# Altium PCB PCB3.PcbDoc
Units mm, origin at the board's own origin, x right, y up, seen from the top; angles counter-clockwise.
Board outline 119.2 x 62.5 mm, 4 copper layers (Top Layer, PWR, GND, Bottom Layer), stack 2.287 mm thick; 32 components, 37 nets, 142 pads, 47 vias.
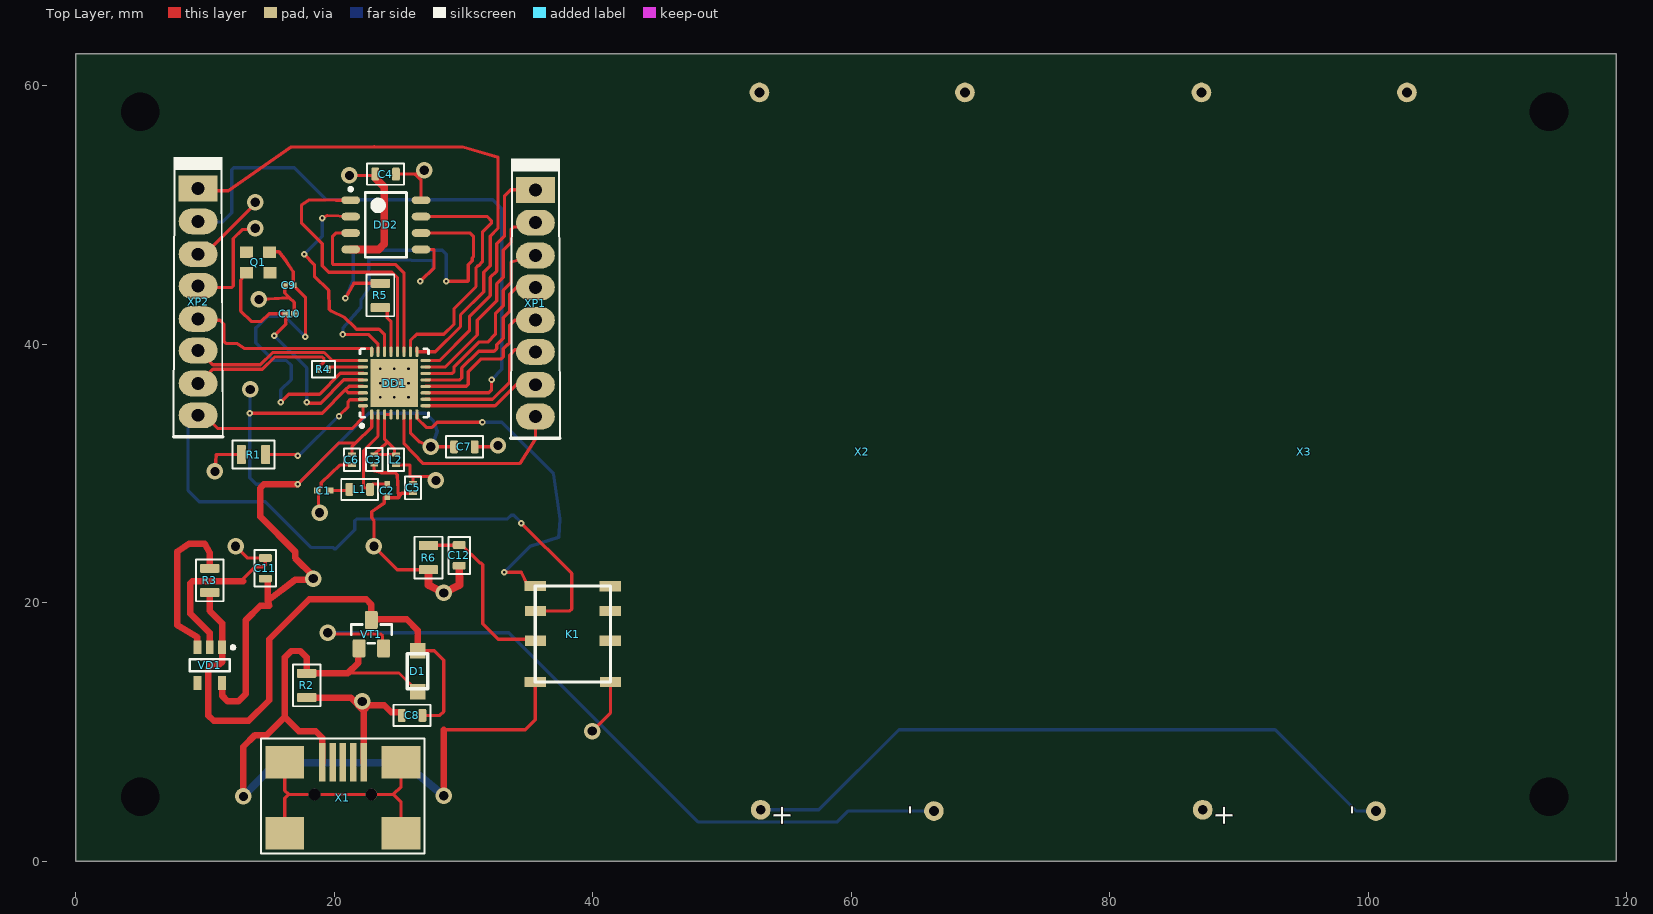
[diagram p0: Top Layer view]
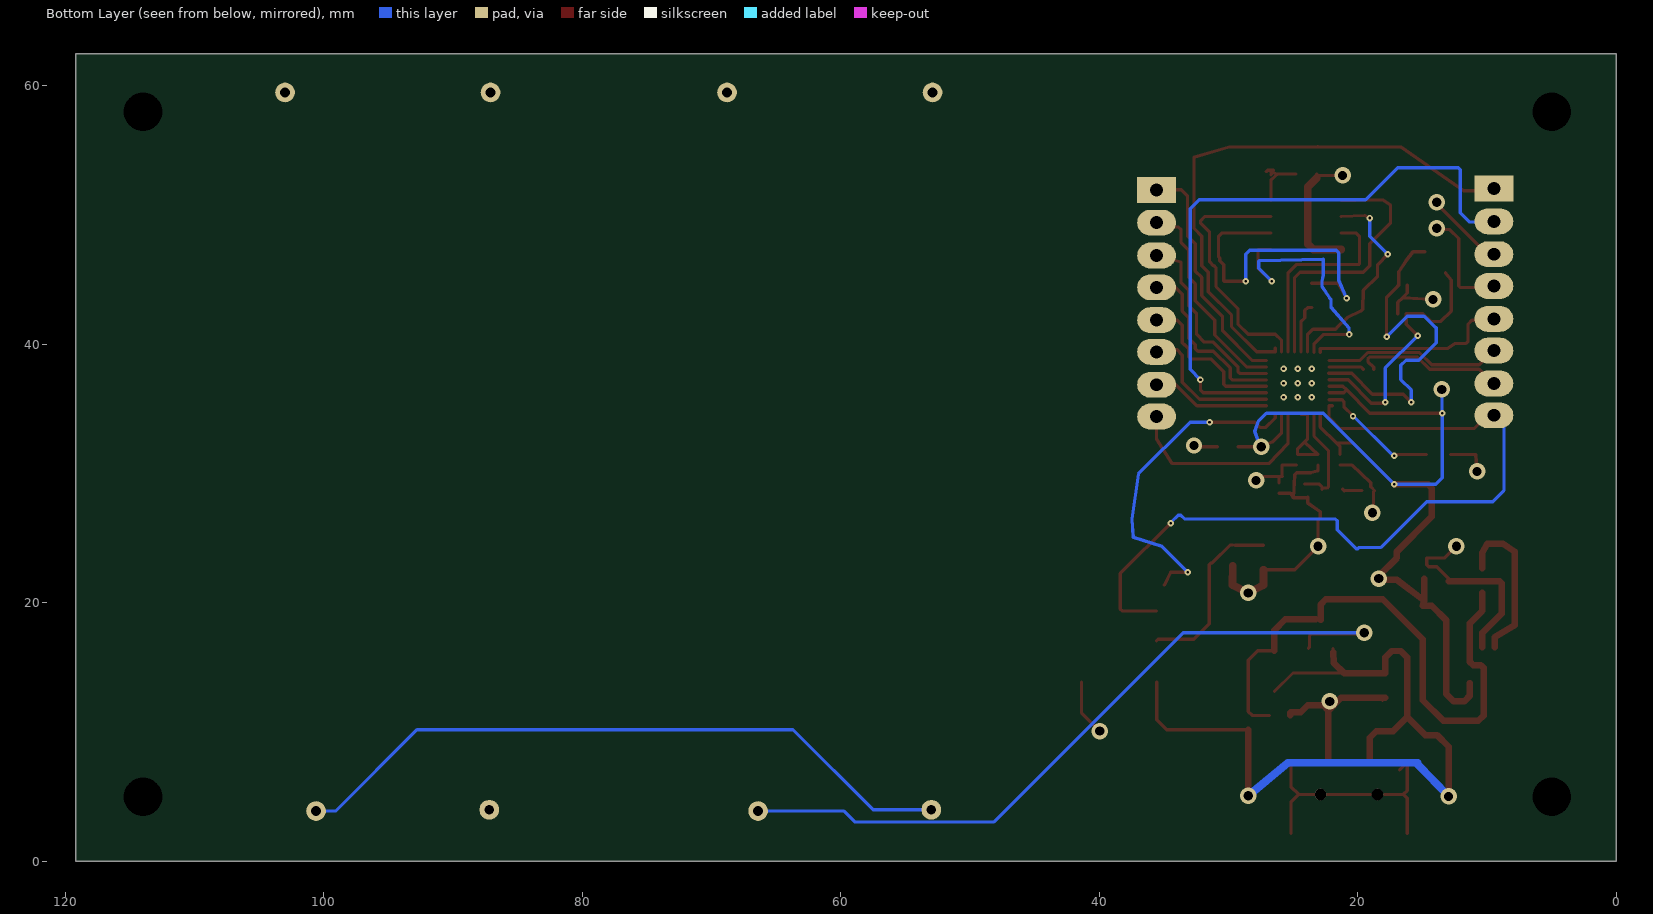
[diagram p1: Bottom Layer view, seen from below]
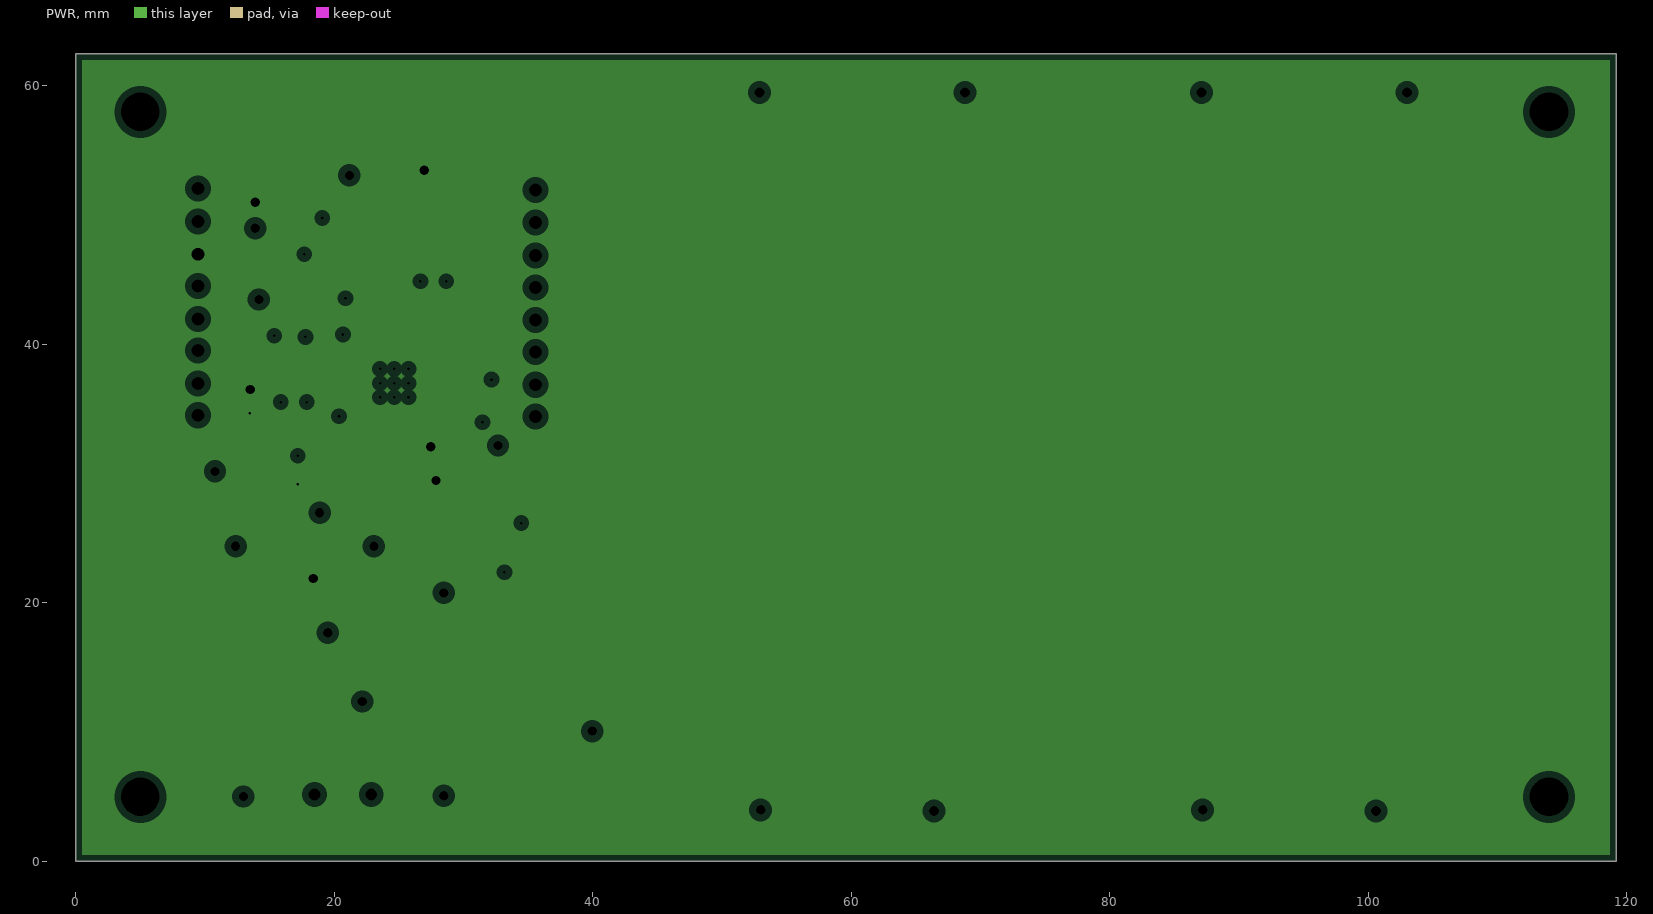
[diagram p2: PWR, clearances drawn from the general rule]
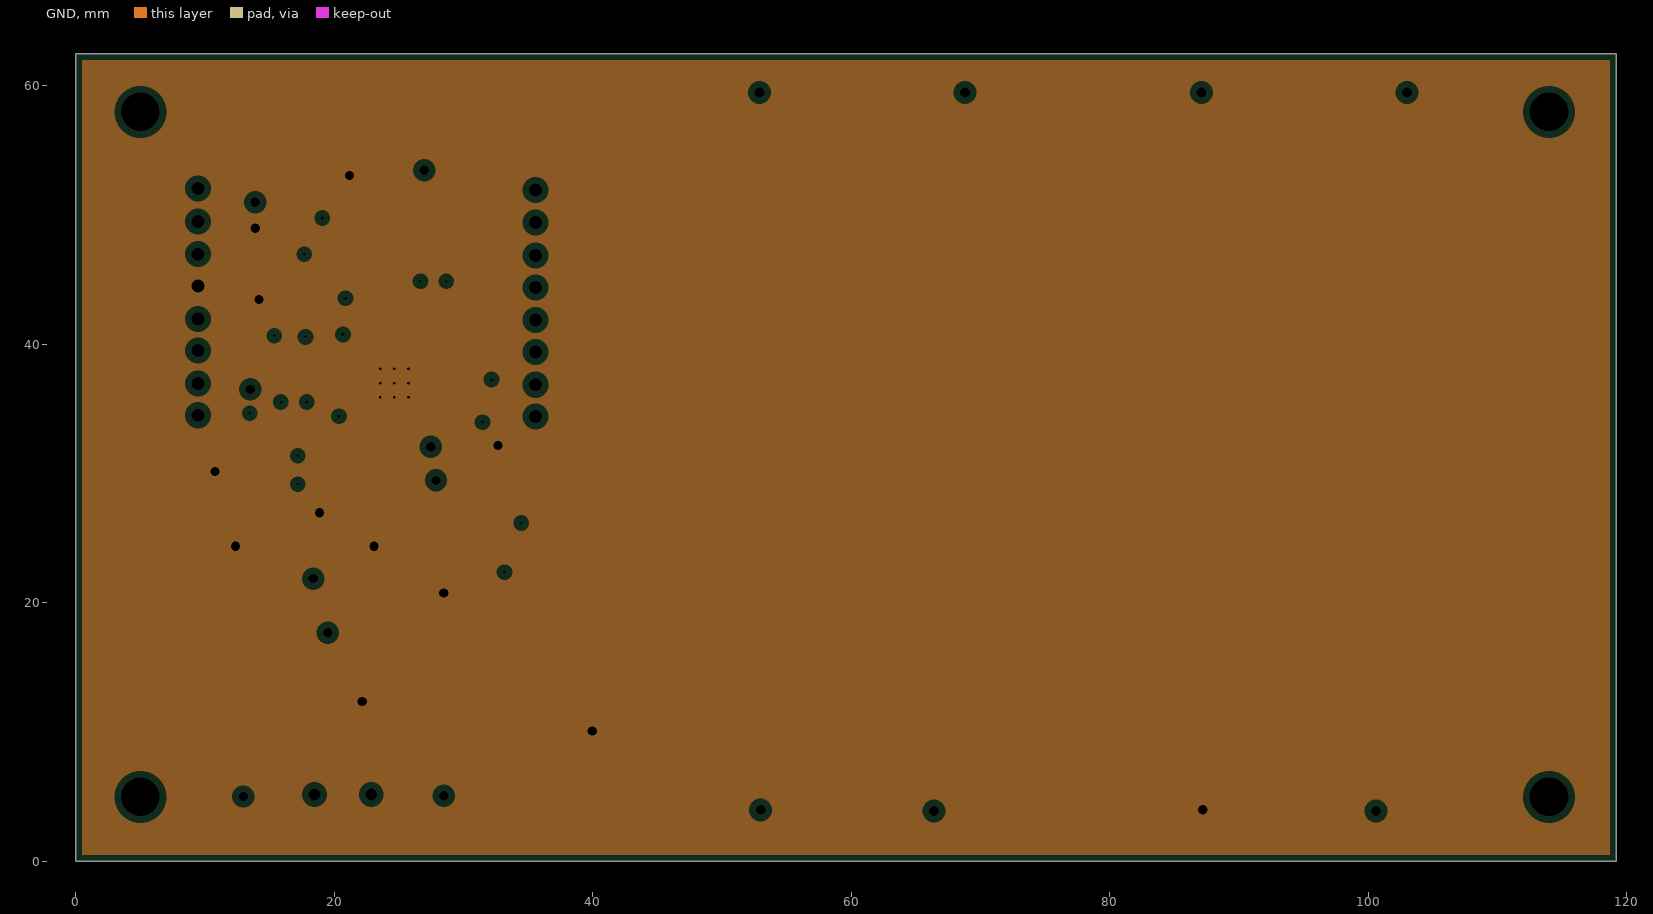
[diagram p3: GND, clearances drawn from the general rule]

## Layer stack, top to bottom
Top Solder: solder mask 0.2, SM-001, Dk 4
Top Layer: signal copper 0.14
Dielectric 2: prepreg 0.2184, PP-023, Dk 4.5
PWR: plane copper 0.035, net 3,3B
Dielectric 1: dielectric 1.5, FR-4, Dk 4.8
GND: plane copper 0.035, net GND
Dielectric 3: prepreg 0.2184, PP-023, Dk 4.5
Bottom Layer: signal copper 0.14
Bottom Solder: solder mask 0.2, SM-001, Dk 4

## Board outline
0,62.5 0,0 119.2,0 119.2,62.5

## Design rules (kind name [scope] priority, off if disabled: settings)
Clearance [All] p1: gap=0.05 ignorepadtopadclearanceinfootprint=TRUE
DiffPairsRouting [All] p1: maxlimit=0.105 minlimit=0.105 mostfreqgap=0.105 toplayer_minwidth=0.248 toplayer_maxwidth=0.248 toplayer_prefwidth=0.248 bottomlayer_minwidth=0.248 bottomlayer_maxwidth=0.248 bottomlayer_prefwidth=0.248 impedanceprofiledriven=TRUE impedanceprofileid={7DA2E2B2-6656-4094-B7E5-A7630A5B4F27} impedanceprofilevalue=50.000000 maxuncoupledlength=12.7
HoleToHoleClearance [All] p1: gap=0.127 allowstackedmicrovias=TRUE
MinimumSolderMaskSliver [All] p1: minsoldermaskwidth=0.05
PlaneClearance [All] p1: clearance=0.508
PlaneConnect [All] p1: planeconnectstyle=Relief reliefexpansion=0.508 reliefentries=4 reliefconductorwidth=0.1 reliefairgap=0.1
PolygonConnect [All] p1: connectstyle=Relief reliefconductorwidth=0.254 reliefentries=4 polygonreliefangle="90 Angle" airgapwidth=0.254
RoutingVias [All] p1 off: holewidth=0.711 width=1.27 viastyle="Through Hole" minholewidth=0.711 minwidth=1.27 maxholewidth=0.711 maxwidth=1.27
ShortCircuit [All] p1: allowed=TRUE
SilkToSilkClearance [All] p1: silktosilkclearance=0.1
SilkToSolderMaskClearance [IsText] p1: minsilkscreentomaskgap=0.1 clearancetoexposedcopper=TRUE
SolderMaskExpansion [All] p1: expansion=0.05 istentingtop=FALSE soldermaskfromhole=TRUE
UnRoutedNet [All] p1: checkbadconnections=TRUE
Width [All] p1: maxlimit=0.6 minlimit=0.1 preferedwidth=0.25 minimp=50.000000 maximp=50.000000 favimp=50.000000
21 further rules are at their usual default settings.

## Classes and differential pairs
differential pair UART: +UART_P -UART_N

## Components (designator, comment, footprint, x,y, rotation, side; value= is the part's Value field where it differs from the comment)
C1 "3пФ" "0201 C0G 7пФ 25В"#1 19.2,28.7 r180 top
C4 "10мкФ" "FB 0603" 23.974,53.184 r0 top
C5 "0,1мкФ" "RES 0402"#1 26.1,28.9 r270 top
C6 "100нФ" "RES 0402"#2 21.374,31.084 r270 top
C8 "10мкФ" "FB 0603" 26.025,11.3 r0 top
C9 "7пкФ" "0201 C0G 7пФ 25В"#2 16.504,44.584 r0 top
C10 "7пкФ" "0201 C0G 7пФ 25В"#2 16.574,42.384 r180 top
D1 "" MBR120 25.85,16.825 r270 top
DD1 "esp8266ex" ESP8266 24.649,37.009 r90 top
DD2 "M25P16-VMN6TP" SOIC-8(3.90мм) 23.999,49.259 r0 top
K1 "gost relay" RELE 41.374,13.884 r90 top
L1 "2,2нГ" "FB 0603" 21.974,28.784 r0 top
L2 "4,3нГ" "RES 0402"#1 24.774,31.084 r270 top
Q1 "26МГц" SMD02520C4 14.125,46.3 r0 top
R1 "12k" "RES 0805" 13.774,31.484 r180 top
R2 "10k" "RES 0805" 17.874,13.634 r270 top
R3 "2K" "RES 0805" 10.374,21.759 r270 top
R4 "499К" "RES 0402"#1 19.174,38.084 r180 top
R5 "200Ом" "RES 0805" 23.574,43.784 r90 top
R6 "2K" "RES 0805" 27.3,23.5 r90 top
VD1 "ap2112" 2112 10.374,15.184 r270 top
VT1 "" SOT23-3 22.874,17.684 r0 top
X1 "usb_micro" USB_mini_B 20.674,-0.716 r180 top
X2 "battery_x2" Battery_x2AA 52.9,59.5 r270 top
X3 "battery_x2" Battery_x2AA 87.1,59.5 r270 top
XP1 "PLD-8" PLD-8 35.574,39.424 r270 top
XP2 "PLD-8" PLD-8 9.474,39.524 r270 top
С2 "2,4пФ" "0201 C0G 7пФ 25В"#1 24.1,28.7 r270 top
С3 "0,1мкФ" "RES 0402"#3 23.1,31.1 r270 top
С7 "1мкФ" "FB 0603" 30.074,32.084 r0 top
С11 "10мкФ" "FB 0603" 14.674,22.684 r270 top
С12 "10мкФ" "FB 0603" 29.674,23.684 r90 top

## Footprints (in the part's own frame and the unit in brackets; to place one, negate y for a bottom-side part, rotate by r counter-clockwise, add the part's x,y. Pads: shape width x height; smd on the part's side, far side on the other; paste and mask are expansions set on the pad)
"0201 C0G 7пФ 25В"#1 [mm] "Chip Capacitor, 2-Leads, Body 0,60x0,30mm, IPC Medium Density"
  rect 0.5x0.44 smd: 1(-0.5,0) 2(0.5,0)
  body extent -0.3,-0.15 0.3,0.15, height 0.23
"0201 C0G 7пФ 25В"#2 [mm] "Chip Capacitor, 2-Leads, Body 0,60x0,30mm, IPC Medium Density"
  rect 0.5x0.44 smd: 1(-0.33,0) 2(0.33,0)
  body extent -0.3,-0.15 0.3,0.15, height 0.23
2112 [mm] "SOT23, 5-Leads, Body 3,00x2,85mm, Pitch 0,95mm, IPC Medium Density"
  rect 1.05x0.6 smd: 1(-1.375,0.95) 2(-1.375,0) 3(-1.375,-0.95) 4(1.375,-0.95) 5(1.375,0.95)
  silkscreen extent -1.5,-1.55 0.45,1.93, body extent -0.85,-1.55 0.85,1.55, height 1.1
Battery_x2AA [mil]
  round 60 hole 30: 1(2188.98,531.5) 2(2185.04,3.94) 99(0,625.98) 99(0,0)
  body extent -43,-358 2232,882, height 630
ESP8266 [mm] "QFN, 32-Leads, Body 5,00x5,00mm, Pitch 0,50mm, Thermal Pad 3,70x3,70mm, IPC Medium Density"
  oval 0.8x0.25 smd: 1(-2.425,1.75) 2(-2.425,1.25) 3(-2.425,0.75) 4(-2.425,0.25) 5(-2.425,-0.25) 6(-2.425,-0.75) 7(-2.425,-1.25) 8(-2.425,-1.75) 17(2.425,-1.75) 18(2.425,-1.25) 19(2.425,-0.75) 20(2.425,-0.25) 21(2.425,0.25) 22(2.425,0.75) 23(2.425,1.25) 24(2.425,1.75)
  oval 0.25x0.8 smd: 9(-1.75,-2.425) 10(-1.25,-2.425) 11(-0.75,-2.425) 12(-0.25,-2.425) 13(0.25,-2.425) 14(0.75,-2.425) 15(1.25,-2.425) 16(1.75,-2.425) 25(1.75,2.425) 26(1.25,2.425) 27(0.75,2.425) 28(0.25,2.425) 29(-0.25,2.425) 30(-0.75,2.425) 31(-1.25,2.425) 32(-1.75,2.425)
  rect 3.7x3.7 smd: 33(0,0)
  silkscreen extent -3.42,-2.65 2.65,2.65, body extent -2.5,-2.5 2.5,2.5, height 0.7
"FB 0603" [mm]
  rrect35% 0.6x1 smd: 1(-0.8,0) 2(0.8,0)
  silkscreen extent -1.43,-0.82 1.43,0.82, body extent -0.8,-0.43 0.8,0.43, height 0.9
MBR120 [mm]
  rect 1.2x1.2 smd: 1(0.525,0.6) 2(3.675,0.6)
  silkscreen extent 0.75,-0.2 3.45,1.4, body extent 0.4,-0.32 3.4,1.48, height 0.25
PLD-8 [mm]
  rect 2x3 hole 1: 1(-12.54,0)
  oval 2x3 hole 1: 2(-10,0) 3(-7.46,0) 4(-5,0) 5(-2.46,0) 6(0,0) 7(2.54,0) 8(5,0)
  silkscreen extent -14.97,-1.9 6.67,1.91, body extent -13.81,-1.28 6.36,1.25, height 8.5
RELE [mm]
  rect 0.8x1.65 smd: 1(0,5.825) 2(3.2,5.8) 3(5.5,5.8) 4(7.425,5.825) 5(7.399,0.026) 6(5.499,0.026) 7(3.199,0.026) 8(0,0)
  silkscreen extent 0,0 7.42,5.82, body extent -1.3,-0.35 8.7,6.15, height 5.65
"RES 0402"#1 [mm]
  rect 0.3x0.6 smd: 1(-0.4,0) 2(0.4,0)
  silkscreen extent -0.87,-0.63 0.87,0.63, body extent -0.5,-0.25 0.5,0.25, height 0.35
"RES 0402"#2 [mm]
  rect 0.3x0.6 smd: 1(-0.4,0)
  rect 0.3x0.6 smd paste+0: 2(0.4,0)
  silkscreen extent -0.87,-0.63 0.87,0.63, body extent -0.5,-0.25 0.5,0.25, height 0.35
"RES 0402"#3 [mm]
  rect 0.3x0.6 smd: 1(-0.4,0)
  rect 0.3x0.6 smd mask+0.1: 2(0.4,0)
  silkscreen extent -0.87,-0.63 0.87,0.63, body extent -0.5,-0.25 0.5,0.25, height 0.35
"RES 0805" [mm]
  rrect25% 0.7x1.5 smd: 1(-0.925,0) 2(0.95,0)
  silkscreen extent -1.6,-1.07 1.63,1.07, body extent -1.05,-0.7 1.05,0.7, height 0.5
SMD02520C4 [mm]
  rect 1x0.9 smd: 1(-0.9,-0.75) 2(0.9,-0.75) 3(0.875,0.85) 4(-0.9,0.85)
  body extent -1.25,-1 1.25,1, height 1
SOIC-8(3.90мм) [mm] "SOIC, 8-Leads, Body 4,90x3,90mm, Pitch 1,27mm, IPC Medium Density"
  oval 1.45x0.6 smd: 1(-2.725,1.905) 2(-2.725,0.635) 3(-2.725,-0.635) 4(-2.725,-1.905) 5(2.725,-1.905) 6(2.725,-0.635) 7(2.725,0.635) 8(2.725,1.905)
  silkscreen extent -2.85,-2.5 1.6,2.88, body extent -2,-2.5 2,2.5, height 1.75
SOT23-3 [mm]
  rrect25% 1x1.4 smd: 1(-0.95,-1.2) 2(0.95,-1.2) 3(0,1)
  silkscreen extent -1.54,-0.8 1.57,0.65, body extent -1.5,-1.25 1.5,1.05, height 1.1
USB_mini_B [mm]
  rect 3x2.5 smd paste-2: 0(-4.5,-2.9) 0(-4.5,-8.4) 0(4.5,-2.9) 0(4.5,-8.4)
  rect 0.5x3 smd: 1(1.6,-8.4) 2(0.8,-8.4) 3(0,-8.4) 4(-0.8,-8.4) 5(-1.6,-8.4)
  round 0.9 hole 0.9 unplated mask+0: H(-2.2,-5.9) H(2.2,-5.9)
  silkscreen extent -6.32,-10.23 6.32,-1.33, body extent -5.35,-9.2 5.35,0, height 3.95

## Part data
C1 C9 C10 С2: library part "0201 cap", Link=https://www.chipdip.ru/product/grm0335c1e7r0bd01d, Емкость=7пФ, Корпус="smd 0201", Напряжение=25
C4 C8 С11 С12: library part GRM188R60G106ME47D, ComponentLink1Description="New link", ComponentLink1URL=https://www.chipdip.ru/product/grm188r60g106me47d, Напряжение=4В, Номинал=10мкФ
C5 C6 С3: library part GRM152C80G104KE19D, ComponentLink1Description="New link", ComponentLink1URL=https://www.chipdip.ru/product/grm152c80g104ke19d, Номинал=100nF
D1: library part MBR120, I=1.0A, Name=MBR120VLSF, V=20V
L1: library part LQW18AN2N2D, Link=https://www.chipdip.ru/product/lqw18an2n2d, Номинал="2.2 нГн"
L2: library part LQP15MN4N3B02D, ComponentLink1Description="New link", ComponentLink1URL=https://www.chipdip.ru/product/lqp15mn4n3b02d, Nom=4.3nH
Q1: library part LBY001XRA001, freequency=26MHz, Korpus=SMD02520C4, Link=https://www.chipdip.ru/product0/8024602401, precission=10ppm
R1 R2 R3 R5 R6: library part "RES 0805"
R4: library part "RES 0402"
VT1: library part SI2325DS-T1-GE3, "N-MOSFET", Continuous drain current=530mA, Gate-to-source voltage=(+-)20B, Manufacturer=IXYS, Power dissipation=750W, id=mosfert31, Part Number=SI2325DS-T1-GE3, Rds=1,2Ohm, Structure=p-channel, Total gate charge=7,7nC, V drain-source max=150B
XP1 XP2: "PLD connector", Manufacturer=NONAME, Connector type="Вилка на плату", Number of contacts=8, Type="Разъем штыревой"
С7: library part "CC0603KRX7R5BB105 1мкФ"
DD2: Link=https://www.chipdip.ru/product/m25p16-vmn6tp-tr, Max freequency="75 MHz", VCC=2.7…3.6V
K1: ComponentLink1Description="New link", ComponentLink1URL=https://www.chipdip.ru/product/hfd4-5sr-im03gr, Name="HFD4/5S(R) (IM03GR)"
VD1: Iout=600, Name=AP2112, Vdrop=1300mV
X2 X3: ComponentLink1Description="New link", ComponentLink1URL=https://www.chipdip.ru/product0/8008602593, Name=BH2AAPC-4-12MM

## Free pads (board coordinates)
  round 1.524 hole 3: 17(5,5) 17(5,58) 17(114,5) 17(114,58)

## Via types
v1: diameter 0.5, hole 0.2, Top Layer to Bottom Layer, 27 vias
v2: diameter 1.27, hole 0.711, Top Layer to Bottom Layer, 19 vias
v3: diameter 1.27, hole 0.711, Top Layer to GND, 1 vias

## Nets (pads, with @x,y where several pads share a name; then routed paths per layer and width w, separated by ;. In a path a pad name is that pad's centre, name@x,y a point inside that pad or via, vN(x,y) a via of type N, cw(c..) or ccw(c..) an arc to the next point about the centre after c; other vN are vias at no path point)
3,3B: C4.2 C5.1 C6.1 DD1.1 DD1.7 DD1.29 DD1.30 DD2.8 L2.2 VD1.5 XP2.3 С7.1 С11.2 | length 97.6
  Top Layer w0.25: XP2.3 9.984,46.984 13.9,50.9 v2(13.9,51) ; C4.2 26.251,53.184 ; C5.1 26.1,29.784 ; DD2.8 26.724,52.707 26.397,53.034 26.397,53.038 26.251,53.184 ; v3(26.974,53.484) 26.297,53.184 26.251,53.184
  Top Layer w0.254: v1(13.474,34.684) 19.074,34.684 20.874,36.484 ; v1(17.174,29.184) 20.374,32.384 21.674,32.384 ; v2(18.374,21.884) v2@18.374,22.084 ; C6.1 21.374,32.084 21.674,32.384 ; DD1.30 21.099,36.259 20.874,36.484 ; DD1.29 21.149,36.759 20.874,36.484 ; DD1.1 22.899,33.609 21.674,32.384 ; L2.2 25.874,30.684 25.874,29.807 25.851,29.784 26.1,29.784 27.574,29.784 v2(27.874,29.484) ; DD1.7 25.899,33.159 26.574,32.484 v2(27.474,32.084) С7.1 ; v3@26.523,53.484 v3(26.974,53.484) v3@27.078,53.38 ; v3@26.699,53.159 v3@26.724,53.134
  Top Layer w0.5: VD1.5 11.324,12.834 11.774,12.384 12.574,12.384 13.174,12.984 13.174,18.684 14.274,19.784 14.974,19.784 14.874,20.184 ; С11.2@14.874,21.884 14.874,20.184 ; v1(17.174,29.184) 14.567,29.184 14.274,28.891 14.274,26.684 16.974,23.984 16.974,23.484 v2@18.374,22.084 ; v2(18.374,21.884) 18.289,21.799 16.989,21.799 14.874,20.184
  Bottom Layer w0.25: XP2.3 XP2.3@10.384,46.984 ; v1(13.474,34.684) 13.487,34.697 13.487,36.512 v2(13.5,36.525)
  Bottom Layer w0.254: v1(13.474,34.684) 13.474,29.684 13.974,29.184 v1(17.174,29.184) 22.674,34.684 27.074,34.684 27.674,34.084 27.974,33.284 v2@27.574,32.084
CLK: DD1.21 R5.1 | length 3.9
  Top Layer w0.254: R5.1 23.886,42.859 24.109,42.636 24.109,42.048 24.399,41.759 DD1.21
GND: C1.2 C4.1 C5.2 C6.2 C8.1 C9.1 C10.1 DD1.33 DD2.4 K1.8 R1.2 R2.2 R6.1 VD1.2 X1.5 X3.2 XP2.4 С2.2 С3.2 С7.2 С11.1 С12.1 | length 89.4
  Top Layer w0.25: XP2.4 XP2.4@9.487,44.424 ; XP2.4@9.974,44.524 XP2.4@9.487,44.424 ; v2@13.538,48.696 13.563,48.696 v2@13.604,48.654 ; C1.2 18.787,28.613 18.787,27.071 v2(18.874,26.984) ; C1.2@18.825,28.825 19,29 19,29.3 20.484,30.684 C6.2 ; v2(21.174,53.084) 23.074,53.084 C4.1 ; v2(23.074,24.384) 24.883,22.575 R6.1 ; XP2.4@9.487,44.424 12.054,44.4 12.2,44.546 12.2,48.2 12.89,48.89 v2@13.79,48.89 ; v2@13.79,48.89 v2(13.9,49) v2@13.79,48.89
  Top Layer w0.254: 8.874,21.535 9.023,21.684 ; v2(10.774,30.184) 10.874,31.484 R1.2 ; v2(12.374,24.384) 13.274,23.484 С11.1 14.674,22.949 14.525,22.8 13.9,22.8 12.974,21.874 12.974,21.684 ; v2(14.174,43.484) 16.539,43.619 ; C9.1 16.174,43.984 16.539,43.619 ; C10.1 16.904,43.254 16.539,43.619 ; R2.2 R2.2@18.097,12.461 ; v2(18.874,26.984) v2@18.944,27.254 ; v2(23.074,24.384) 23.074,26.414 22.904,26.584 22.904,27.054 23.874,27.744 23.874,28.184 23.925,28.133 24.974,28.133 ; С3.2@23.074,30.684 23.074,30.233 23.623,30.084 24.725,30.084 24.874,29.935 24.974,28.133 ; C4.1@23.174,52.884 C4.1@23.174,53.084 ; C5.2 25.207,28.5 24.974,28.133 ; С12.1@29.501,22.711 С12.1 ; С12.1@29.643,22.822 29.675,22.853 С12.1@29.68,22.859 ; С7.2 32.574,32.084 v2(32.674,32.184) ; v2(39.974,10.084) 41.374,11.484 K1.8
  Top Layer w0.5: 8.874,21.535 8.874,19.184 10.374,17.684 VD1.2 ; 9.023,21.684 12.974,21.684 ; R2.2 21.274,12.684 22.274,11.684 ; X1.5 22.274,11.684 ; 22.274,11.684 22.674,12.084 23.874,12.084 24.408,11.55 C8.1@25.175,11.55 ; C8.1@25.175,11.55 C8.1 25.225,11.5 C8.1@25.175,11.55
  Top Layer w0.6: DD2.4 23.444,47.354 23.874,47.784 23.874,52.184 C4.1@23.174,52.884 ; R6.1 27.3,21.4 v2(28.474,20.784) 29.7,21.4 29.675,22.853 С12.1
  other v1: 23.549,35.909 24.649,35.909 25.749,35.909 23.549,37.009 24.649,37.009 25.749,37.009 23.549,38.109 24.649,38.109 25.749,38.109
  other v2: 22.174,12.384
HOLD: DD1.18 DD2.7 | length 19.6
  Top Layer w0.254: DD1.18 25.899,40.309 26.374,40.784 28.474,40.784 29.274,41.584 29.274,42.784 30.974,44.484 30.974,45.935 31.123,46.084 31.174,46.084 31.474,46.384 31.474,48.684 32.169,49.379 32.169,49.589 31.864,49.894 DD2.7
IO0: DD1.15 XP1.2 | length 15.9
  Top Layer w0.254: DD1.15 28.599,38.259 31.074,40.734 31.074,41.884 32.574,43.384 32.574,44.684 33.074,45.184 33.074,47.284 33.674,47.884 33.674,48.884 33.88,49.09 XP1.2@35.24,49.09
IO2: DD1.14 XP1.3 | length 14.9
  Top Layer w0.254: DD1.14 29.125,37.759 29.274,37.908 29.274,38.284 31.174,40.184 31.874,40.184 32.474,40.784 32.474,42.384 33.074,42.984 33.074,44.184 33.674,44.784 33.674,46.384 XP1.3
IO4: DD1.16 XP1.1 | length 18.5
  Top Layer w0.254: DD1.16 28.149,38.759 30.474,41.084 30.474,42.184 32.074,43.784 32.074,45.184 32.574,45.684 32.574,47.784 33.174,48.384 33.174,51.484 33.654,51.964 XP1.1
IO5: DD1.24 XP2.5 | length 15.4
  Top Layer w0.254: XP2.5 9.574,41.884 11.174,41.884 11.474,41.584 11.474,40.233 11.623,40.084 12.474,40.084 13.074,39.684 21.274,39.684 21.674,39.684 DD1.24@22.897,39.684 ; DD1.24@22.896,39.643 22.898,39.641 DD1.24@22.898,39.393
IO12: DD1.10 XP1.6 | length 11.5
  Top Layer w0.254: DD1.10 32.249,35.759 33.574,37.084 33.574,39.184 33.974,39.584 XP1.6@35.774,39.584
IO13: DD1.12 XP1.5 | length 12.4
  Top Layer w0.254: DD1.12 30.225,36.759 30.374,36.908 30.374,37.884 31.374,38.884 32.925,38.884 33.074,39.033 33.074,39.684 33.374,39.984 33.425,39.984 33.574,40.133 33.574,41.484 33.974,41.884 XP1.5@34.574,41.884
  Bottom Layer w0.254: XP1.5 XP1.5@36.315,42.625
IO14: DD1.9 XP1.7 | length 9.2
  Top Layer w0.254: DD1.9 32.449,35.259 34.074,36.884 XP1.7
IO15: DD1.13 XP1.4 | length 13.8
  Top Layer w0.254: DD1.13 29.725,37.259 29.874,37.408 29.874,38.184 31.174,39.484 32.374,39.484 32.574,39.684 32.574,39.984 33.074,40.484 33.074,42.084 33.574,42.584 33.574,43.884 34.114,44.424 XP1.4
Net*_IN: C1.1 L1.1 | length 1.6
  Top Layer w0.254: C1.1@19.789,28.699 C1.1 21.044,28.684 21.159,28.799 L1.1
NetC8_2: C8.2 D1.1 R3.2 VD1.1 VT1.3 | length 45.2
  Top Layer w0.25: D1.1 27.75,16.3 28.475,15.575 28.475,11.6 28.175,11.3 C8.2
  Top Layer w0.254: VT1.3 22.874,18.609 22.897,18.617 VT1.3@23.247,18.736
  Top Layer w0.5: R3.2 10.374,19.384 11.324,18.434 VD1.1 11.324,15.434 11.074,15.184 10.474,15.184 10.274,14.984 10.274,11.284 10.674,10.884 13.374,10.884 14.974,12.484 14.974,17.184 18.074,20.284 22.474,20.284 22.874,19.884 VT1.3 ; VT1.3@23.247,18.736 25.614,18.736 26.45,17.9 D1.1
NetC9_2: C9.2 DD1.27 Q1.3 | length 28.2
  Top Layer w0.254: Q1.3@14.824,47.184 15.725,47.175 16.275,46.475 16.834,45.624 C9.2 16.864,44.584 16.957,44.491 16.957,44.461 17.774,43.644 v1(17.774,40.584) ; v1(15.873,35.543) 16.473,36.143 18.873,36.143 20.473,37.768 DD1.27@22.248,37.768
  Bottom Layer w0.254: v1@15.874,35.584 15.874,36.484 16.674,37.284 16.674,37.884 16.674,38.384 16.274,38.784 15.274,38.784 13.923,40.135 13.923,41.284 13.974,41.284 14.874,42.184 16.174,42.184 v1(17.774,40.584)
NetC10_2: C10.2 DD1.28 Q1.1 | length 20.5
  Top Layer w0.254: Q1.1 12.774,44.984 12.774,42.584 13.574,41.784 14.374,41.784 14.974,42.384 C10.2 16.244,41.554 v1(15.374,40.684) ; v1(17.873,35.543) 17.973,35.443 18.973,35.443 20.748,37.268 DD1.28@22.223,37.268
  Bottom Layer w0.254: v1(15.374,40.684) 17.874,38.184 v1@17.874,35.584
NetDD1_2: DD1.2 L1.2 С2.1 | length 8.3
  Top Layer w0.233: L1.2 22.674,28.884 22.374,28.884 22.274,28.984 22.274,31.784 23.399,32.909 DD1.2
  Top Layer w0.25: L1.2 22.774,28.984 22.99,29.2 С2.1
NetDD1_3: DD1.3 DD1.4 L2.1 С3.1 | length 6.8
  Top Layer w0.25: DD1.3 DD1.4
  Top Layer w0.254: DD1.3 23.899,32.659 24.674,31.884 24.674,31.484 С3.1 24.074,32.384
NetDD1_26: DD1.26 R4.1 | length 2.7
  Top Layer w0.248: R4.1 19.749,38.259 DD1.26
NetDD1_31: DD1.31 R1.1 | length 9.6
  Top Layer w0.254: R1.1 17.074,31.484 v1(17.174,31.384) ; v1(20.373,34.443) 20.373,34.48 21.073,35.18 21.073,35.569 21.222,35.718 DD1.31@22.223,35.718
  Bottom Layer w0.254: v1(17.174,31.384) 17.274,31.384 v1@20.374,34.484
NetDD2_6: DD2.6 R5.2 | length 26
  Top Layer w0.254: v1(20.874,43.584) 21.524,44.734 R5.2 ; DD2.6 30.534,48.624 30.774,48.384 30.774,46.784 30.674,46.684 30.674,46.484 30.374,46.184 30.374,44.933 30.325,44.884 v1(28.674,44.884)
  Bottom Layer w0.254: v1(20.874,43.584) 21.474,44.984 21.474,47.084 21.674,47.284 28.374,47.284 28.674,46.984 v1(28.674,44.884)
NetK1_3: K1.2 R6.2 С12.2 | length 13.8
  Top Layer w0.25: R6.2 27.317,24.467 29.483,24.467 С12.2@29.5,24.45 ; С12.2 29.874,24.484 31.258,23.1 31.354,23.1 31.5,22.954 31.5,18.4 32.7,17.2 35.458,17.2 K1.2
NetR3_1: R3.1 VD1.3 | length 12.6
  Top Layer w0.5: VD1.3 9.424,17.334 7.874,18.284 7.874,23.984 8.774,24.584 9.974,24.584 10.374,23.884 R3.1
NetX2_2: X2.2 X3.1 | length 52.8
  Bottom Layer w0.25: X2.2 57.5,4 63.7,10.2 92.8,10.2 99.1,3.9 X3.1
RST: DD1.32 K1.3 XP2.8 | length 61.1
  Top Layer w0.25: XP2.8 9.974,34.524 10.998,33.5 21.4,33.5 22.224,34.324 DD1.32
  Top Layer w0.254: v1(34.474,26.184) 38.374,22.284 38.374,19.533 38.225,19.384 35.774,19.384 K1.3
  Bottom Layer w0.25: XP2.8 8.7,33.75 8.7,28.7 9.568,27.832 14.668,27.832 18.2,24.3 19.9,24.3 19.996,24.204 20.133,24.204 21.6,25.671 21.6,26.354 21.746,26.5 33.4,26.5 33.696,26.796 33.904,26.796 34.474,26.226 v1(34.474,26.184)
SCS: DD1.20 DD2.1 | length 21.2
  Top Layer w0.254: DD2.1 20.154,51.164 19.909,51.184 18.049,51.184 17.474,50.784 17.474,49.384 19.074,47.784 19.074,46.084 19.574,45.584 24.474,45.584 24.899,45.159 DD1.20
SDI: DD1.23 DD2.5 | length 21.1
  Top Layer w0.254: v1(20.675,40.775) 22.647,40.775 23.398,40.024 DD1.23@23.398,39.393 ; v1(26.674,44.884) 27.725,45.935 27.725,47.354 DD2.5
  Bottom Layer w0.25: v1(20.675,40.775) 20.675,41.25
  Bottom Layer w0.254: 20.675,41.25 22.074,42.884 22.074,43.484 22.174,43.584 22.774,44.484 22.774,44.884 22.682,45.376 22.682,46.584 27.625,46.484 27.674,46.435 27.674,45.884 v1(26.674,44.884)
SDO: DD1.22 DD2.2 | length 17
  Top Layer w0.254: v1(17.674,46.984) 18.474,46.184 18.474,45.284 19.574,44.184 19.625,42.733 19.774,42.584 20.823,42.084 21.574,41.333 21.723,41.184 23.474,41.184 23.899,40.759 DD1.22 ; v1(19.074,49.784) 19.474,49.984 DD2.2
  Bottom Layer w0.254: v1(17.674,46.984) 19.074,48.384 v1(19.074,49.784)
SLEEP: DD1.8 K1.4 | length 25.5
  Top Layer w0.254: DD1.8 26.399,34.313 27.128,33.584 27.574,33.584 27.974,33.984 v1(31.474,33.984) ; v1(33.174,22.384) 34.474,22.384 K1.4@34.974,21.384
  Bottom Layer w0.254: v1(31.474,33.984) 32.974,33.984 36.974,29.984 37.474,26.484 37.374,25.084 35.174,24.384 v1(33.174,22.384)
TOUT: DD1.6 XP1.8 | length 15.9
  Top Layer w0.254: DD1.6 25.399,32.359 26.874,30.784 34.374,30.784 35.574,32.684 XP1.8
UART_N: R4.2 XP2.7 | length 11.8
  Top Layer w0.248: XP2.7@9.328,36.984 XP2.7 9.523,36.984 10.616,38.077 14.434,38.077 15.386,39.029 19.073,39.029 19.218,38.884 19.218,38.678 18.774,38.234 R4.2
UART_P: DD1.25 XP2.6 | length 13.9
  Top Layer w0.248: XP2.6 9.523,39.524 10.616,38.431 14.288,38.431 15.24,39.383 19.219,39.383 19.843,38.759 DD1.25
VBAT: VT1.2 X2.1 | length 58.7
  Top Layer w0.25: v2(19.5,17.7) 19.6,17.6 23.6,17.6 23.746,17.454 23.746,16.562 VT1.2
  Bottom Layer w0.25: v2(19.5,17.7) 33.504,17.7 48.141,3.063 58.915,3.063 59.752,3.9 X2.1
VCC: D1.2 K1.1 R2.1 VT1.1 X1.1 | length 66.1
  Top Layer w0.25: 21.074,14.584 25.016,14.584 D1.2
  Top Layer w0.254: VT1.1@21.899,16.184 VT1.1 ; 28.474,10.184 34.774,10.184 35.549,10.959 K1.1
  Top Layer w0.5: v2(12.974,5.034) 12.974,8.884 13.874,9.784 14.774,9.784 16.174,11.184 ; R2.1 21.049,14.559 ; R2.1@17.874,14.659 17.874,15.784 17.374,16.284 16.674,16.284 16.174,15.784 16.174,11.184 ; X1.1 19.074,9.584 18.574,10.084 17.274,10.084 16.174,11.184 ; 21.074,14.584 21.874,15.384 VT1.1@21.899,16.184 ; v2@28.474,4.884 28.474,10.184
  Bottom Layer w0.254: 15.374,7.535 15.374,7.635 ; 25.423,7.635 25.574,7.484
  Bottom Layer w0.6: v2(12.974,5.034) 15.374,7.535 ; 15.374,7.635 25.423,7.635 v2(28.474,5.084)
VIO1: DD1.11 XP2.2 | length 48.1
  Top Layer w0.254: DD1.11 31.949,36.259 32.174,36.484 v1(32.174,37.284)
  Bottom Layer w0.254: XP2.2 9.514,49.484 11.374,49.484 12.074,50.184 12.074,53.535 12.223,53.684 16.916,53.684 19.4,51.2 32.274,51.2 32.974,50.5 32.974,38.084 v1(32.174,37.284)
VIO2: DD1.17 XP2.1 | length 43.2
  Top Layer w0.254: XP2.1 9.654,51.884 11.774,51.884 16.674,55.284 23.1,55.3 29.974,55.284 32.674,54.484 32.674,48.984 32.074,48.384 32.074,46.084 31.574,45.584 31.574,44.084 29.774,42.284 29.774,41.384 27.824,39.434 DD1.17 DD1.17@26.399,39.705
WP: DD1.19 DD2.3 | length 15.6
  Top Layer w0.254: DD2.3 20.114,48.624 19.874,48.384 19.874,46.233 19.923,46.184 24.774,46.184 25.399,45.559 DD1.19
pads on no net: DD1.5 K1.5 K1.6 K1.7 Q1.2 Q1.4 VD1.4 X1.0 X1.2 X1.3 X1.4 X1.H X2.99 X3.99
copper on no net: | length 22
  Top Layer w0.254: 9.474,34.524 9.714,34.284 ; 16.174,2.184 16.174,4.884 16.474,5.184 ; 16.774,7.084 16.174,7.684 16.174,5.484 16.474,5.184 ; 21.953,35.259 22.224,35.259 ; 25.174,2.884 25.174,2.184 25.174,4.584 24.574,5.184 ; 25.174,7.684 25.174,5.784 24.574,5.184 ; 16.474,5.184 18.474,5.184 22.874,5.184 24.574,5.184

## Polygon pours and split planes (outlines as drawn)
3,3B on PWR (split plane): 118.69,0.51 0.51,0.51 0.51,61.99 118.69,61.99
GND on GND (split plane): 118.69,0.51 0.51,0.51 0.51,61.99 118.69,61.99

## Text inside footprints (layer, text, board x,y; h text height)
X2: Top Overlay "-" at 63.992,4.346 h1.52 r270; Top Overlay "+" at 54,4.446 h1.52 r270
X3: Top Overlay "+" at 88.2,4.446 h1.52 r270; Top Overlay "-" at 98.192,4.346 h1.52 r270